# Altium PCB MainBoard_PCB.pcbdoc
Units mil, origin at the board's own origin, x right, y up, seen from the top; angles counter-clockwise.
Board outline 3695 x 4134.98 mil, 2 copper layers (Top Layer, Bottom Layer); 50 components, 43 nets, 212 pads, 192 vias.
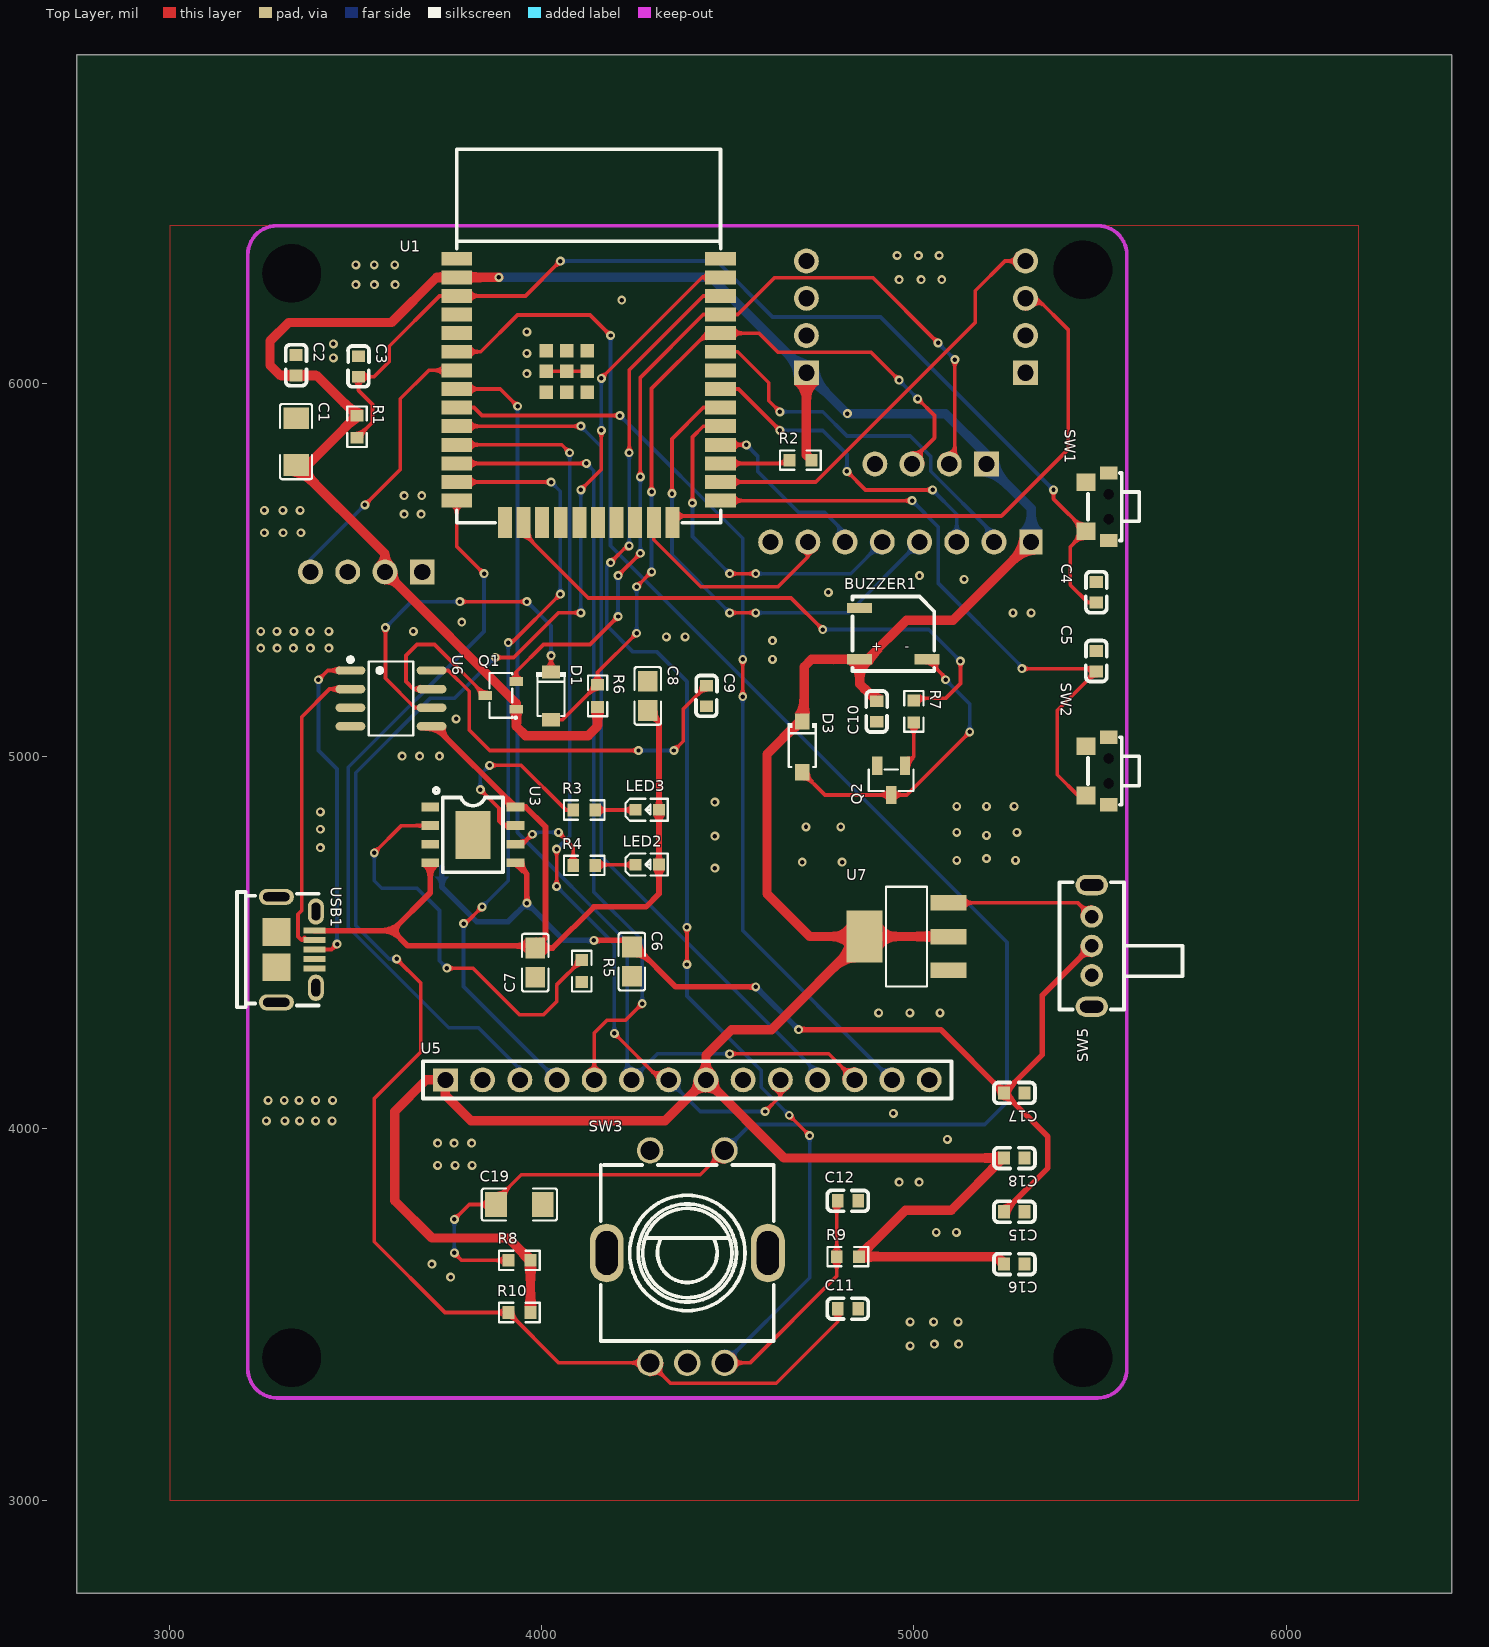
[diagram p0: Top Layer view]
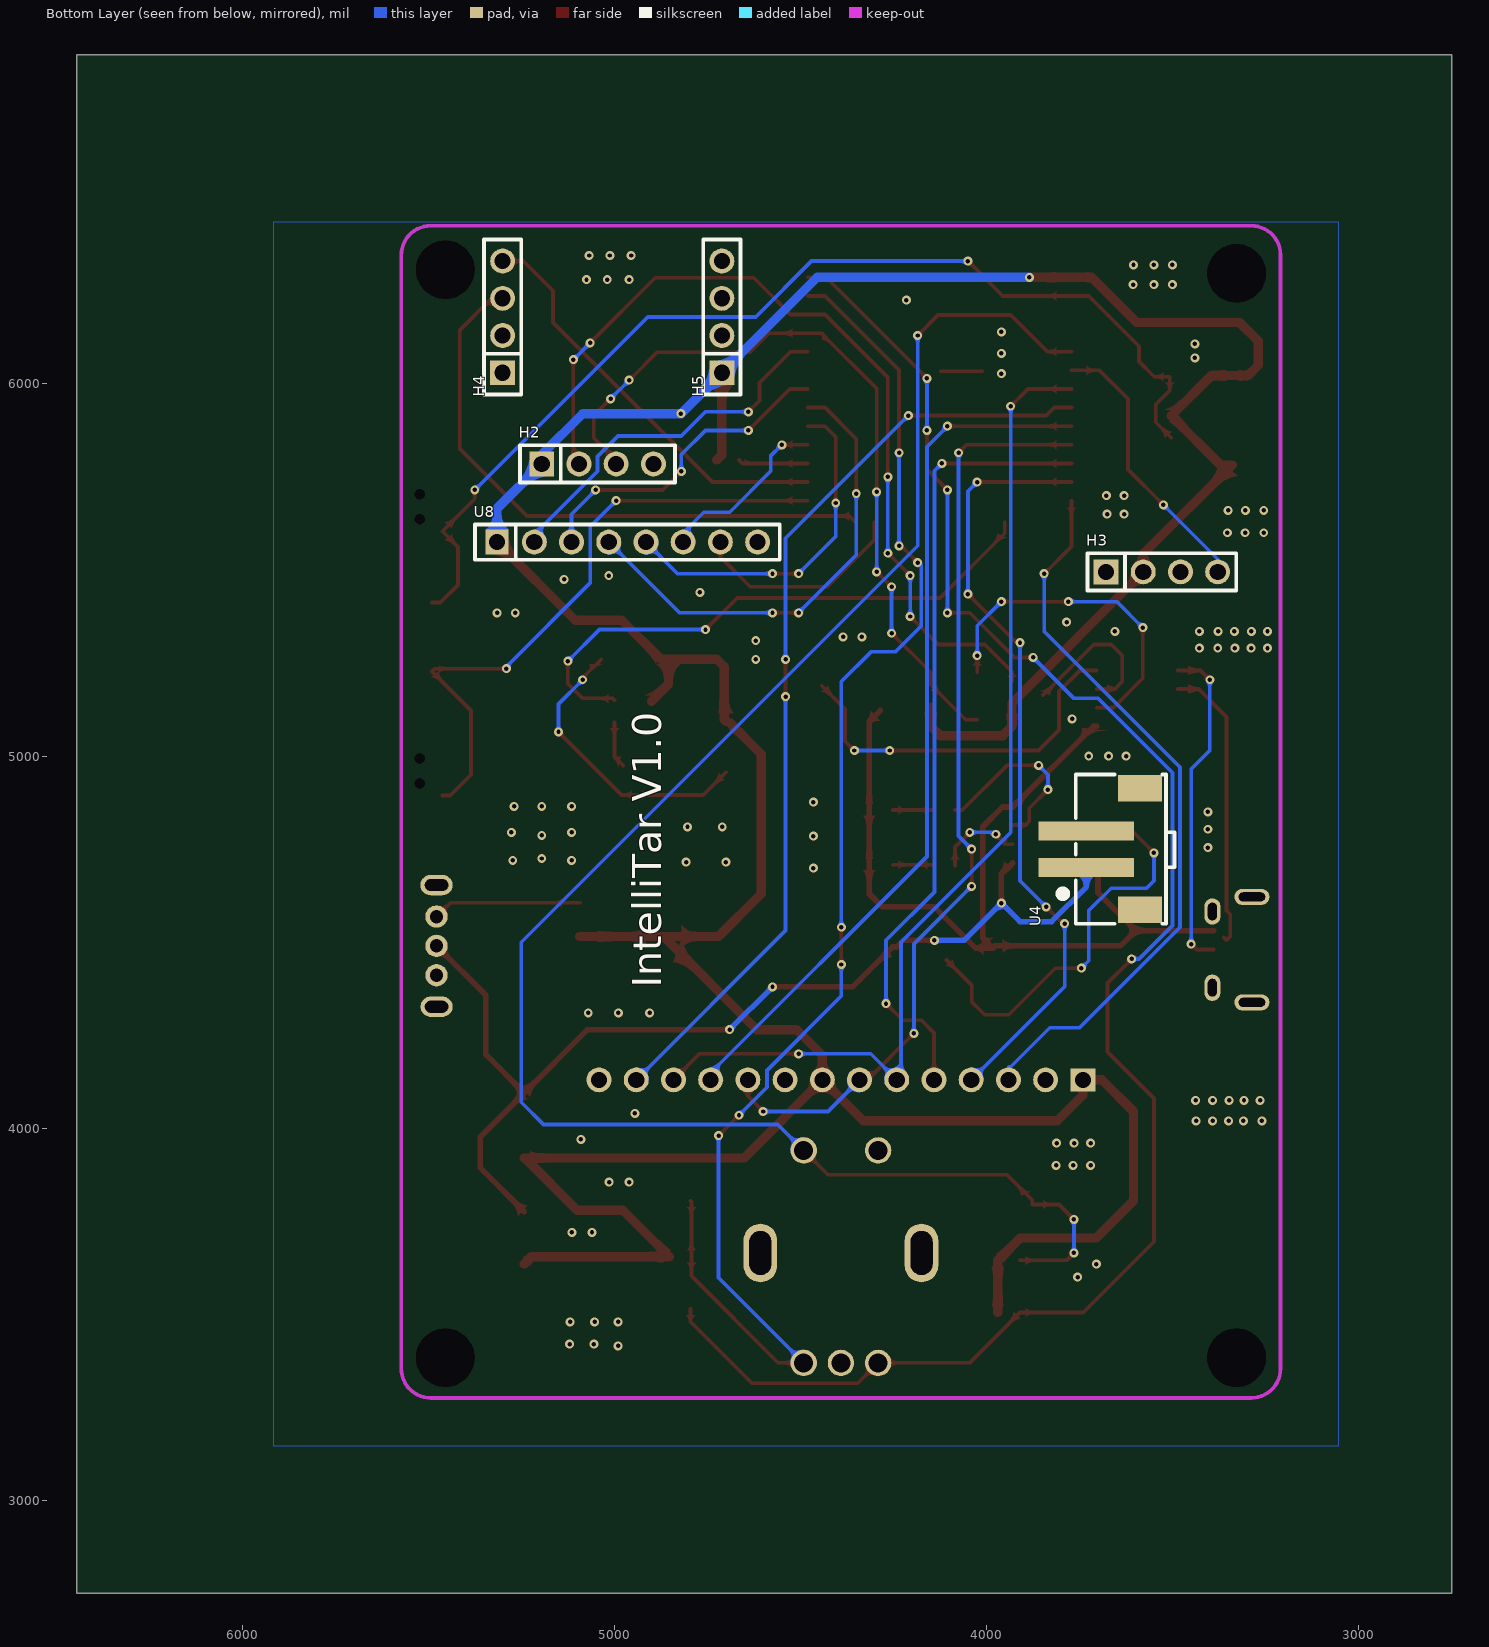
[diagram p1: Bottom Layer view, seen from below]

## Layer stack, top to bottom
Top Layer: signal copper (thickness not stored)
Dielectric: dielectric 12.6, FR-4, Dk 4.8
Bottom Layer: signal copper (thickness not stored)

## Board outline
6445,2750 2750,2750 2750,6884.98 6445,6884.98
cut-out: 3406.85,6296.89 ccw(c3328.11,6296.89) 3249.37,6296.89 ccw(c3328.11,6296.89)
cut-out: 3406.85,3383.5 ccw(c3328.11,3383.5) 3249.37,3383.5 ccw(c3328.11,3383.5)
cut-out: 5532.83,3383.5 ccw(c5454.09,3383.5) 5375.35,3383.5 ccw(c5454.09,3383.5)
cut-out: 5532.83,6306.89 ccw(c5454.09,6306.89) 5375.35,6306.89 ccw(c5454.09,6306.89)

## Components (designator, comment, footprint, x,y, rotation, side; value= is the part's Value field where it differs from the comment)
BUZZER1 "MLT-5020" BUZ-SMD_L5.0-W5.5-P4.60 4944.79,5328.74 r0 top
C1 "CL31A226KAHNNNE" C1206 3340,5845 r270 top
C2 "CC0603KRX7R9BB104" C0603 3339.89,6050 r270 top
C3 "CL10A105KB8NNNC" C0603 3507.44,6046.75 r270 top
C4 "CC0603KRX7R9BB104" C0603 5490,5440 r270 top
C5 "CC0603KRX7R9BB104" C0603 5490,5255 r270 top
C6 "CL21A106KAYNNNE_C15850" C0805 4242.15,4447.7 r270 top
C7 "CL21A106KAYNNNE_C15850" C0805 3982.5,4445 r90 top
C8 "CL21A106KAYNNNE_C15850" C0805 4285,5161.73 r270 top
C9 "CC0603KRX7R9BB104" C0603 4442.53,5161.43 r270 top
C10 "CC0603KRX7R9BB104" C0603 4900.08,5120 r90 top
C11 "CC0603KRX7R9BB104" C0603 4822.81,3515 r0 top
C12 "CC0603KRX7R9BB104" C0603 4822.81,3805 r0 top
C15 "CC0603KRX7R9BB104" C0603 5269.69,3775.62 r180 top
C16 "CC0603KRX7R9BB104" C0603 5269.69,3635.21 r180 top
C17 "CL10A106MA8NRNC" C0603 5269.69,4095 r180 top
C18 "CL10A106MA8NRNC" C0603 5269.69,3920 r180 top
C19 "CL31A107MQHNNNE" C1206 3940,3795 r0 top
D1 "B0520W_C475609" SOD-123_L2.7-W1.6-LS3.7-RD 4025,5161.73 r270 top
D3 "1N4148W_C81598" SOD-123F_L2.7-W1.6-LS3.8-RD 4700,5025 r270 top
H2 "PM254V-11-04-H85" HDR-TH_4P-P2.54-V-F 5045,5785 r180 bottom
H3 "X6511WV-04H-C60D30" HDR-TH_4P-P2.54-V-M 3528.81,5495 r180 bottom
H4 "PM254V-11-04-H85" HDR-TH_4P-P2.54-V-F 5300,6180 r90 bottom
H5 "PM254V-11-04-H85" HDR-TH_4P-P2.54-V-F 4711.06,6180 r90 bottom
LED2 "19-217/GHC-YR1S2/3T" LED0603-RD 4283.63,4708.25 r0 top
LED3 "NCD0603R1_C84263" LED0603-RD_RED 4283.64,4855.69 r0 top
Q1 "2SK3018" SOT-23-3_L2.9-W1.4-P1.90-LS2.6-BR 3890,5163.14 r0 top
Q2 "SS8050_C2150" SOT-23-3_L2.9-W1.3-P1.90-LS2.4-BR 4938.87,4935 r90 top
R1 "0603WAF1002T5E" R0603 3503.49,5885 r270 top
R2 "0603WAF1002T5E" R0603 4695,5795.27 r0 top
R3 "0603WAF1201T5E" R0603 4114.13,4855 r0 top
R4 "0603WAF1201T5E" R0603 4114.13,4706.15 r0 top
R5 "0603WAF1201T5E" R0603 4107.35,4422.22 r270 top
R6 "0603WAF2001T5E" R0603 4150,5161.73 r270 top
R7 "0603WAF1001T5E" R0603 4999.79,5120 r270 top
R8 "0603WAF1002T5E" R0603 3940,3645 r0 top
R9 "0603WAF1002T5E" R0603 4822.5,3655 r0 top
R10 "0603WAF1002T5E" R0603 3940,3505 r0 top
SW1 "TS24CA" SW-SMD_TS24CA 5492.5,5670 r270 top
SW2 "TS24CA" SW-SMD_TS24CA 5492.5,4960 r270 top
SW3 "EC11E15244G1" SW-TH_EC11E15244G1 4391.1,3655 r0 top
SW5 "SK12D07VG4" SW-TH_SK12D07VG4 5477.72,4490 r90 top
U1 "ESP32-WROOM-32E" WIFI-SMD_ESP32-WROOM-32E-A 4126.1,5981.93 r0 top
U3 "TP4056-42-ESOP8" ESOP-8_L4.9-W3.9-P1.27-LS6.0-BL-EP 3815,4788.12 r270 top
U4 "2.54-2PLTDK" COMM-SMD_2P-P2.50_SHOUHAN_2.54-2PLTDK 3660,4750 r90 bottom
U5 "PM254-1-14-Z-8.5" HDR-TH_14P-P2.54-V-F-1 4391.1,4130 r0 top
U6 "CH340N_C506813" SOP-8_L5.0-W4.0-P1.27-LS6.0-BL 3595,5155 r270 top
U7 "BL9110-330BPFB" SOT-223_L6.5-W3.5-P2.30-LS7.0-BR 4980,4515.04 r0 top
U8 "PM254-1-08-Z-8.5" HDR-TH_8P-P2.54-V-F 4965,5575 r180 bottom
USB1 "U254-051N-4BH24-S2S" MICRO-USB-SMD_U254-051N-4BH24-S2 3340,4480 r270 top

## Footprints (in the part's own frame and the unit in brackets; to place one, negate y for a bottom-side part, rotate by r counter-clockwise, add the part's x,y. Pads: shape width x height; smd on the part's side, far side on the other; paste and mask are expansions set on the pad)
BUZ-SMD_L5.0-W5.5-P4.60 [mm]
  rect 1.7x0.7 smd mask+0.051: 1(-2.3,-1.75) 2(2.3,-1.75) 3(-2.3,1.75)
  silkscreen extent -2.79,-2.54 2.79,2.54
C0603 [mm]
  rect 0.8x0.9 smd mask+0.051: 1(-0.7,0) 2(0.7,0)
  silkscreen extent -1.41,-0.71 1.39,0.72
C0805 [mm]
  rect 1.41x1.35 smd paste-100 mask+0.051: 1(-1,0) 2(1,0)
  silkscreen extent -1.96,-0.9 1.96,0.9
C1206 [mm]
  rect 1.485x1.728 smd paste-100 mask+0.051: 1(-1.593,0) 2(1.593,0)
  silkscreen extent -2.56,-1.09 2.56,1.09
COMM-SMD_2P-P2.50_SHOUHAN_2.54-2PLTDK [mm]
  rect 1.3x6.5 smd paste+0 mask+0.05: 1(-1.25,1.825) 2(1.25,1.825)
  rect 1.8x3 smd paste+0 mask+0.05: 3(4.15,-1.825) 4(-4.15,-1.825)
  silkscreen extent -5.1,-4.19 5.1,3.68
ESOP-8_L4.9-W3.9-P1.27-LS6.0-BL-EP [mm]
  rect 0.6x1.2 smd mask+0.051: 1(-1.905,-2.908) 2(-0.635,-2.908) 3(0.635,-2.908) 4(1.905,-2.908) 5(1.905,2.908) 6(0.635,2.908) 7(-0.635,2.908) 8(-1.905,2.908)
  rect 3.3x2.4 smd mask+0.051: 9(0,0)
  silkscreen extent -3.2,-2.67 2.55,2.05
HDR-TH_4P-P2.54-V-F [mm]
  rect 1.7x1.7 hole 1.1 mask+0.051: 1(-3.81,0)
  round 1.7 hole 1.1 mask+0.051: 2(-1.27,0) 3(1.27,0) 4(3.81,0)
  silkscreen extent -5.29,-1.27 5.29,1.27
HDR-TH_4P-P2.54-V-M [mm]
  rect 1.7x1.7 hole 1.1 mask+0.051: 1(-3.81,0)
  round 1.7 hole 1.1 mask+0.051: 2(-1.27,0) 3(1.27,0) 4(3.81,0)
  silkscreen extent -5.08,-1.27 5.08,1.27
HDR-TH_8P-P2.54-V-F [mm]
  rect 1.575x1.7 hole 1.1 mask+0.051: 1(-8.89,0)
  round 1.7 hole 1.1 mask+0.051: 2(-6.35,0) 3(-3.81,0) 4(-1.27,0) 5(1.27,0) 6(3.81,0) 7(6.35,0) 8(8.89,0)
  silkscreen extent -10.4,-1.2 10.4,1.2
HDR-TH_14P-P2.54-V-F-1 [mm]
  rect 1.7x1.575 hole 1.1 mask+0.051: 1(-16.51,0)
  round 1.7 hole 1.1 mask+0.051: 2(-13.97,0) 3(-11.43,0) 4(-8.89,0) 5(-6.35,0) 6(-3.81,0) 7(-1.27,0) 8(1.27,0) 9(3.81,0) 10(6.35,0) 11(8.89,0) 12(11.43,0) 13(13.97,0) 14(16.51,0)
  silkscreen extent -18.03,-1.27 18.03,1.27
LED0603-RD [mm]
  rect 0.8x0.8 smd mask+0.051: 1(-0.799,-0.003) 2(0.799,0.003)
  silkscreen extent -1.49,-0.75 1.39,0.76
LED0603-RD_RED [mm]
  rect 0.8x0.8 smd mask+0.051: 1(-0.8,-0.003) 2(0.8,0.003)
  silkscreen extent -1.49,-0.75 1.39,0.76
MICRO-USB-SMD_U254-051N-4BH24-S2 [mm]
  rect 0.4x1.5 smd paste-100 mask+0.051: 1(-1.3,1.25) 2(-0.65,1.25) 3(0,1.25) 4(0.65,1.25) 5(1.3,1.25)
  oval 1.1x2.4 hole 0.6 slot 1.8 at 90 deg mask+0.051: 6(-3.6,-1.35) 6(3.6,-1.35)
  oval 1.8x1.1 hole 0.6 slot 1.2 at 0 deg mask+0.051: 6(-2.6,1.35) 6(2.6,1.35)
  rect 1.9x1.9 smd paste-100 mask+0.051: 6(-1.2,-1.35) 6(1.2,-1.35)
  silkscreen extent -3.93,-4.04 3.93,1.52
R0603 [mil]
  rect 31.75x34.02 smd paste-3937.01 mask+2: 1(-29.66,0) 2(29.66,0)
  silkscreen extent -55,-26 55,26
SOD-123_L2.7-W1.6-LS3.7-RD [mm]
  rect 0.91x1.22 smd mask+0.051: 1(-1.635,0) 2(1.635,0)
  silkscreen extent -1.6,-1 1.38,1
SOD-123F_L2.7-W1.6-LS3.8-RD [mm]
  rect 1.1x1 smd mask+0.051: 1(-1.735,0) 2(1.735,0)
  silkscreen extent -1.6,-1 1.38,1
SOP-8_L5.0-W4.0-P1.27-LS6.0-BL [mil]
  oval 22.6x80.14 smd mask+2: 1(-75,-108.97) 2(-25,-108.97) 3(25,-108.97) 4(75,-108.97) 5(75,108.97) 6(25,108.97) 7(-25,108.97) 8(-75,108.97)
  silkscreen extent -110,-115 99,60
SOT-23-3_L2.9-W1.3-P1.90-LS2.4-BR [mm]
  rect 1.25x0.7 smd mask+0.051: 1(1,-0.95) 2(1,0.95) 3(-1,0)
  silkscreen extent -0.73,-1.53 0.73,1.53
SOT-23-3_L2.9-W1.4-P1.90-LS2.6-BR [mm]
  rect 0.91x0.6 smd mask+0.051: 1(1.055,-0.955) 2(1.055,0.955) 3(-1.055,0)
  silkscreen extent -0.78,-1.6 1.09,1.53
SOT-223_L6.5-W3.5-P2.30-LS7.0-BR [mm]
  rect 2.465x1.05 smd mask+0.051: 1(2.857,-2.3) 2(2.857,0) 3(2.857,2.3)
  rect 2.465x3.54 smd mask+0.051: 4(-2.857,0)
  silkscreen extent -1.4,-3.4 1.4,3.4
SW-SMD_TS24CA [mm]
  rect 0.9x1.2 smd mask+0.051: 1(-2.3,0.775) 2(2.3,0.775)
  rect 1.2x1.3 smd mask+0.051: 3(-1.675,-0.775) 4(1.675,-0.775)
  Multi-Layer board cut-out: -0.85,1.125 -1.002,1.09 -1.124,0.993 -1.191,0.853 -1.191,0.697 -1.124,0.557 -1.002,0.46 -0.85,0.425 -0.85,0.425 -0.698,0.46 -0.576,0.557 -0.509,0.697 -0.509,0.853 -0.576,0.993 -0.698,1.09 -0.85,1.125
  Multi-Layer board cut-out: 0.85,1.125 0.698,1.09 0.576,0.993 0.509,0.853 0.509,0.697 0.576,0.557 0.698,0.46 0.85,0.425 0.85,0.425 1.002,0.46 1.124,0.557 1.191,0.697 1.191,0.853 1.124,0.993 1.002,1.09 0.85,1.125
  silkscreen extent -2.3,-0.62 2.3,2.88
SW-TH_EC11E15244G1 [mm]
  oval 2.3x4 hole 1.5 slot 3 at 90 deg mask+0.051: 6(5.5,0.25) 7(-5.5,0.25)
  round 1.8 hole 1.3 mask+0.051: A(-2.54,-7.25) B(2.54,-7.25) C(0,-7.25) D(-2.54,7.25) E(2.54,7.25)
  silkscreen extent -5.9,-5.75 5.9,6.25
SW-TH_SK12D07VG4 [mil]
  round 60 hole 36 mask+2: 1(-78.74,0) 2(0,0) 3(78.74,0)
  oval 55.12x86.61 hole 31.5 slot 62.99 at 90 deg mask+2: 4(163.39,-0.01) 5(-163.39,0)
  silkscreen extent -171,-244 171,87
WIFI-SMD_ESP32-WROOM-32E-A [mm]
  rect 2.1x0.95 smd mask+0.051: 1(-9,9.003) 2(-9,7.733) 3(-9,6.463) 4(-9,5.193) 5(-9,3.923) 6(-9,2.653) 7(-9,1.383) 8(-9,0.113) 9(-9,-1.157) 10(-9,-2.427) 11(-9,-3.697) 12(-9,-4.967) 13(-9,-6.237) 14(-9,-7.507) 25(9,-7.507) 26(9,-6.237) 27(9,-4.967) 28(9,-3.697) 29(9,-2.427) 30(9,-1.157) 31(9,0.113) 32(9,1.383) 33(9,2.653) 34(9,3.923) 35(9,5.193) 36(9,6.463) 37(9,7.733) 38(9,9.003)
  rect 0.95x2.1 smd mask+0.051: 15(-5.715,-9.003) 16(-4.445,-9.003) 17(-3.175,-9.003) 18(-1.905,-9.003) 19(-0.635,-9.003) 20(0.635,-9.003) 21(1.905,-9.003) 22(3.175,-9.003) 23(4.445,-9.003) 24(5.715,-9.003)
  rect 0.9x0.9 smd mask+0.051: 39(-2.9,-0.108) 39(-2.9,1.322) 39(-2.9,2.722) 39(-1.5,1.322) 39(-1.5,-0.108) 39(-1.5,2.722) 39(-0.1,-0.108) 39(-0.1,1.322) 39(-0.1,2.722)
  silkscreen extent -9,-9.02 9.02,16.48

## Via types
v1: diameter 24.02, hole 12.01, Top Layer to Bottom Layer, 192 vias

## Nets (pads, with @x,y where several pads share a name; then routed paths per layer and width w, separated by ;. In a path a pad name is that pad's centre, name@x,y a point inside that pad or via, vN(x,y) a via of type N, cw(c..) or ccw(c..) an arc to the next point about the centre after c; other vN are vias at no path point)
3V3: BUZZER1.1 C1.2 C2.2 C10.2 C16.2 C18.2 D3.1 H2.1 H3.2 H5.1 Q1.1 R1.1 R2.2 R6.2 R8.2 R9.2 R10.2 U1.2 U5.1 U5.8 U7.2 U7.4 U8.1 | length 10794.8
  Top Layer w25: v1(3885,6286.36) U1.2 3717.93,6286.36 3596.57,6165 3320,6165 3270,6115 3270,6050 3297.56,6022.44 C2.2 3395.71,6022.44 R1.1 3371.13,5782.3 C1.2 3578.81,5543.49 H3.2 3931.54,5142.27 Q1.1 3931.54,5080 3956.54,5055 4125,5055 4150,5080 R6.2 ; R10.2 R8.2 3909.66,3705 3705,3705 3605,3805 3605,4045 3690,4130 U5.1 3741.1,4088.9 3810,4020 4331.1,4020 U5.8 ; D3.1@4690,5090 4605,5005 4605,4630 4719.96,4515.04 U7.4 ; D3.1 4705,5098.31 4705,5240 4724.85,5259.85 BUZZER1.1 ; H5.1 4711.06,5808.87 R2.2 ; C10.2 4854.24,5193.4 BUZZER1.1 ; U7.2 U7.4 ; C16.2 5222.35,3655 R9.2 4977.16,3780 5100,3780 C18.2@5240,3920 ; C18.2 C18.2@5240,3920 ; U8.1 5105,5365 4980,5365 4874.85,5259.85 BUZZER1.1 ; U5.8 4651.1,3920 C18.2@5240,3920 ; U5.8 4441.1,4196.1 4510,4265 4617.46,4265 U7.4
  Bottom Layer w25: v1(3885,6286.36) 4454.7,6286.36 H5.1 v1(4821.06,5920) 5085,5920 5195,5810 H2.1 5315,5665 U8.1
$1N1883: R2.1 U1.27 | length 188.6
  Top Layer w10: U1.27 4656.42,5786.36 R2.1
$1N3284: R3.1 U3.7 | length 504.7
  Top Layer w10: v1(3835,4910) 3885,4860 3885,4825 3895,4815 3927.62,4815 U3.7 ; v1(3860,4975) 3945,4975 4065,4855 R3.1
  Bottom Layer w10: v1(3835,4910) 3835,4950 v1(3860,4975)
$1N3295: R4.1 U3.6 | length 233.9
  Top Layer w10: U3.6 3948.12,4763.12 v1(3975,4790) ; v1(4045,4795) 4084.47,4755.53 R4.1
  Bottom Layer w10: v1(3975,4790) 3980,4795 v1(4045,4795)
$1N3334: LED3.1 R3.2 | length 108.6
  Top Layer w10: R3.2 4251.6,4855 LED3.1
$1N3373: LED2.1 R4.2 | length 109.2
  Top Layer w10: R4.2 4145.75,4708.12 LED2.1
$1N3449: R5.1 U3.2 | length 1128.3
  Top Layer w10: v1(3550,4740) 3623.12,4813.12 U3.2 ; v1(3745,4430) 3815,4430 3940,4305 4005,4305 4040,4340 4040,4384.53 R5.1
  Bottom Layer w10: v1(3550,4740) 3550,4665 3570,4645 3665,4645 3725,4585 3725,4450 v1(3745,4430)
$1N5959: C9.1 U6.8 | length 1011.3
  Top Layer w10: U6.8 3749.04,5230 3805,5174.04 3805,5070 3860,5015 v1(4260,5015) ; v1(4355,5015) 4380,5040 4380,5126.46 C9.1
  Bottom Layer w10: v1(4260,5015) v1(4355,5015)
$1N6739: BUZZER1.2 D3.2 Q2.3 | length 787.8
  Top Layer w10: D3.2 4761.06,4895.63 Q2.3 4980.63,4895.63 v1(5150,5065) ; BUZZER1.2 5085,5210.19 v1(5085,5205)
  Bottom Layer w10: v1(5085,5205) 5150,5140 v1(5150,5065)
$1N6840: Q2.1 R7.2 | length 125.7
  Top Layer w10: Q2.1 4999.79,4997.9 R7.2
$1N8457: Q1.3 U6.7 | length 429.8
  Top Layer w10: U6.7 3655,5180 3635,5200 3635,5270 3665,5300 3711.6,5300 Q1.3
$1N8461: D1.1 U6.6 | length 917.6
  Top Layer w10: v1(3580,5345) 3580,5208.9 3658.9,5130 U6.6 ; v1(3780,5415) v1(3960,5415) ; D1.1 v1(4025,5270)
  Bottom Layer w10: v1(3580,5345) 3650,5415 v1(3780,5415) ; v1(3960,5415) 4025,5350 v1(4025,5270)
$1N12783: SW5.3 U7.3 | length 400.5
  Top Layer w10: U7.3 5440.86,4605.59 SW5.3
BEEP: R7.1 U1.16 | length 1548.9
  Top Layer w10: U1.16 3951.11,5598.89 4125,5425 4670,5425 v1(4755,5340) ; R7.1 5005.13,5155 5085,5155 5125,5195 v1(5125,5255)
  Bottom Layer w10: v1(4755,5340) 5040,5340 v1(5125,5255)
D+: U6.1 USB1.3 | length 894
  Top Layer w10: USB1.3@3389.31,4480 3435,4480 v1(3450,4495) ; v1(3400,5205) 3425,5230 U6.1
  Bottom Layer w10: v1(3400,5205) 3400,5015 3450,4965 v1(3450,4495)
D-: U6.2 USB1.2 | length 780
  Top Layer w10: USB1.2@3362.31,4512.31 3355.59,4505.59 3354.78,4505.59 3345,4515.37 3345,4575 3355,4585 3355,5105 3430,5180 U6.2
EC11_A: C11.1 R10.1 SW3.A U1.37 | length 4770.6
  Top Layer w10: v1(3610,4455) 3675,4390 3675,4205 3550,4080 3550,3695 3740,3505 R10.1 4045.78,3369.57 SW3.A 4345.66,3315 4630,3315 4795.25,3480.25 C11.1 ; v1(3875,5265) 3925,5265 4045,5385 v1(4105,5385) ; v1(4105,5715) 4160,5770 v1(4160,5875) ; v1(4160,6015) 4431.36,6286.36 U1.37
  Bottom Layer w10: v1(3610,4455) 3590,4455 3500,4545 3500,4955 3700,5155 3765,5155 v1(3875,5265) ; v1(4105,5385) v1(4105,5715) ; v1(4160,5875) v1(4160,6015)
EC11_B: C12.1 R9.1 SW3.B U1.36 | length 3983.5
  Top Layer w10: v1(4185,5520) 4230,5565 v1(4235,5565) ; v1(4235,5815) 4235,6037.27 4434.09,6236.36 U1.36 ; v1(4390,4440) v1(4390,4540) ; SW3.B 4559.56,3369.57 4792.84,3602.84 R9.1 4792.84,3802.59 C12.1 ; v1(4665,4035) v1(4720,3980)
  Bottom Layer w10: v1(4185,5520) 4175,5510 4175,5350 4245,5280 4310,5280 4390,5200 v1(4390,4540) ; v1(4235,5565) v1(4235,5815) ; v1(4390,4440) 4390,4355 4590,4155 4590,4110 v1(4665,4035) ; SW3.B 4720,3598.47 v1(4720,3980)
EC11_KEY: C19.1 R8.1 SW3.E U1.6 | length 4844.3
  Top Layer w10: v1(3765,3665) 3785,3645 R8.1 ; v1(3765,3755) 3805,3795 C19.1 3877.3,3807.3 3945,3875 4425.66,3875 SW3.E ; U1.6 3836.36,6086.36 3935,6185 4130,6185 v1(4185,6130)
  Bottom Layer w10: v1(3765,3665) v1(3765,3755) ; v1(4185,6130) 4185,5565 5250,4500 5250,4070 5190,4010 4560.66,4010 SW3.E
EN: C3.2 C4.2 R1.2 SW1.4 U1.3 | length 2869.7
  Top Layer w10: R1.2 3545,5896.85 3545,5945 3507.44,5982.56 C3.2 3549.19,6019.19 3590,6060 3590,6100.93 3725.43,6236.36 U1.3 3956.36,6236.36 v1(4050,6330) ; v1(5375,5715) 5375,5691.04 SW1.4 5420,5562.06 5420,5460 5467.56,5412.44 C4.2
  Bottom Layer w10: v1(4050,6330) 4470,6330 4620,6180 4910,6180 v1(5375,5715)
GND: C1.1 C2.1 C3.1 C4.1 C5.1 C6.2 C7.1 C8.1 C9.2 C10.1 C11.2 C12.2 C15.1 C16.1 C17.1 C18.1 C19.2 H2.4 H3.1 H3.3 H4.1 Q2.2 R5.2 SW1.3 SW2.3 SW3.6 SW3.7 SW3.C SW3.D SW5.4 SW5.5 U1.1 U1.15 U1.38 U1.39 U3.1 U3.3 U3.9 U4.2 U4.3 U4.4 U5.2 U6.3 U7.1 U8.8 USB1.5 USB1.6 | length 110.2
  Top Layer w10: U1.39@4011.93,6033.96 4067.04,6033.96 U1.39@4122.17,6033.96
  other v1: 4990,3415 5055,3420 5120.27,3420 4990,3480 5053.13,3480 5118.84,3480 3755,3600 3705,3635 5060,3720 5113.84,3720 4960,3855 5013.84,3855 3720,3900 3767.42,3900 3813.13,3900 3720,3960 3764.56,3960 3811.7,3960 5090,3970 3260,4020 3309.56,4020 3349.56,4020 3392.42,4020 3436.7,4020 4945,4040 3265,4075 3308.13,4075 3348.13,4075 3392.42,4075 3438.13,4075 4905,4310 4989.08,4310 5070.04,4310 4465,4699.05 4700,4715 4807.18,4715 5115,4720 5272.89,4720 5195,4724.76 3405,4753.93 4465,4785 5195,4786.67 5115,4795 5276.7,4795 3405,4803.46 4710,4810 4803.37,4810 3405,4850 5115,4865 5195,4865 5269.08,4865 4465,4876.19 3625,5000 3671.94,5000 3725.27,5000 3770,5100 4620,5260 3245,5290 3289.08,5290 3332.89,5290 3378.61,5290 3428.13,5290 4620,5310 4335,5320 4385,5320 3245,5335 3288.13,5335 3333.84,5335 3377.65,5335 3428.13,5335 3655,5335 3785,5360 5266.23,5385 5315,5385 4770,5440 5135,5475 5015,5485 3255,5600 3305.27,5600 3352.89,5600 3630,5650 3675.75,5650 3255,5660 3304.32,5660 3350.99,5660 3630,5700 3677.65,5700 3960,6027.62 3440,6070 3960,6081.91 3440,6107.78 3960,6140 4215,6225 3500.56,6266.89 3550.09,6266.89 3605.96,6266.89 4960,6280 5019.08,6280 5074.8,6280 3500.56,6320 3550,6320 3605,6320 4955,6345 5011.94,6345 5067.65,6345
IO0: C5.2 SW2.4 U1.25 | length 1712.3
  Top Layer w10: U1.25 v1(4995,5686.36) ; v1(5290,5235) 5482.44,5235 C5.2 5385,5122.44 5385,4950 5440.95,4894.05 SW2.4
  Bottom Layer w10: v1(4995,5686.36) 5065,5616.36 5065,5465 5290,5240 v1(5290,5235)
MIC: H3.4 U1.7 | length 748.3
  Top Layer w10: v1(3525,5675) 3620,5770 3620,5960 3696.36,6036.36 U1.7
  Bottom Layer w10: H3.4 3378.81,5528.81 v1(3525,5675)
RCLK_X: U1.30 U8.4 | length 1285.4
  Top Layer w10: v1(4350,5705) 4350,5852.27 4434.09,5936.36 U1.30 ; v1(4505,5385) v1(4575,5385)
  Bottom Layer w10: v1(4350,5705) 4350,5540 v1(4505,5385) ; v1(4575,5385) 4825,5385 U8.4
RCLK_Y: U1.23 U8.7 | length 585.6
  Top Layer w10: U1.23 4301.11,5581.16 4427.27,5455 4635,5455 4715,5535 U8.7
RXD: D1.2 H2.3 R6.1 U1.34 | length 2088.3
  Top Layer w10: D1.2 4055.97,5097.36 R6.1 4150,5225 v1(4255,5330) ; v1(4255,5455) v1(4295,5495) ; v1(4295,5710) 4295,5987.43 4443.93,6136.36 U1.34 4583.64,6136.36 4635,6085 4885,6085 v1(4960,6010) ; H2.3 4995,5795 5055,5855 5055,5915 v1(5010,5960)
  Bottom Layer w10: v1(4255,5330) v1(4255,5455) ; v1(4295,5495) v1(4295,5710) ; v1(4960,6010) v1(5010,5960)
SER_X: U1.33 U8.2 | length 1009.7
  Top Layer w10: U1.33 4526.77,6086.36 4610,6003.13 4610,5955 v1(4640,5925)
  Bottom Layer w10: v1(4640,5925) 4755,5925 4820,5860 4990,5860 5045,5805 5045,5765 5215,5595 U8.2
SER_Y: U1.29 U8.5 | length 941.4
  Top Layer w10: v1(4405,5680) 4405,5857.27 4434.09,5886.36 U1.29 ; v1(4505,5490) v1(4575,5490)
  Bottom Layer w10: v1(4405,5680) 4405,5590 v1(4505,5490) ; v1(4575,5490) 4830,5490 U8.5
SRCLK_X: U1.31 U8.3 | length 875.3
  Top Layer w10: U1.31 4528.64,5986.36 v1(4640,5875) ; v1(4820,5765) 4870,5715 v1(5050,5715)
  Bottom Layer w10: v1(4640,5875) 4755,5875 4820,5810 v1(4820,5765) ; v1(5050,5715) 5115,5650 U8.3
SRCLK_Y: U1.28 U8.6 | length 481.7
  Top Layer w10: U1.28 v1(4550,5836.36)
  Bottom Layer w10: v1(4550,5836.36) 4580,5806.36 4580,5765 4690,5655 4760,5655 4815,5600 U8.6
T_CS: U1.10 U5.11 | length 2353.1
  Top Layer w10: U1.10 v1(4105,5886.36)
  Bottom Layer w10: v1(4105,5886.36) 4160,5831.36 4160,4730 4741.1,4148.9 U5.11
TFT_CS: U1.14 U5.3 | length 1943.2
  Top Layer w10: U1.14 3771.77,5563.23 v1(3845,5490)
  Bottom Layer w10: v1(3845,5490) 3845,5335 3480,4970 3480,4540 3750,4270 3830,4270 3935,4165 3940,4165
TFT_DC/RS: U1.12 U5.5 | length 2149.4
  Top Layer w10: U1.12 v1(4120,5786.36) ; U5.5 4141.1,4256.1 4175,4290 4225,4290 v1(4270,4335)
  Bottom Layer w10: v1(4120,5786.36) 4140,5766.36 4140,4635 4270,4505 v1(4270,4335)
TFT_MISO: U1.9 U5.13 | length 2534.9
  Top Layer w10: U1.9 3818.11,5936.36 3839.47,5915 v1(4210,5915) ; v1(4540,5160) v1(4540,5260)
  Bottom Layer w10: v1(4210,5915) 4540,5585 v1(4540,5260) ; v1(4540,5160) 4540,4531.1 U5.13
TFT_MOSI: U1.8 U5.6 U5.12 | length 2777.2
  Top Layer w10: U1.8 3888.64,5986.36 v1(3935,5940) ; v1(4505,4200) 4771.1,4200 U5.12
  Bottom Layer w10: v1(3935,5940) 3935,4795 4230,4500 4230,4141.1 U5.6 4311.1,4200 v1(4505,4200)
TFT_RST: U1.13 U5.4 | length 2090.4
  Top Layer w10: U1.13 v1(4025,5736.36) ; v1(3790,4550) 3795,4550 v1(3840,4595) ; v1(3910,5305) 3920,5305 v1(4050,5435)
  Bottom Layer w10: v1(3790,4550) 3790,4381.1 U5.4 ; v1(3840,4595) 3910,4665 v1(3910,5305) ; v1(4025,5736.36) 4050,5711.36 v1(4050,5435)
TFT_SCK: U1.11 U5.7 U5.10 | length 2544.8
  Top Layer w10: U1.11 4053.64,5836.36 v1(4075,5815) ; v1(4040,4650) v1(4040,4750) ; v1(4195,4255) 4320,4130 U5.7 ; v1(4600,4045) 4641.1,4086.1 U5.10
  Bottom Layer w10: v1(4040,4650) 4195,4495 v1(4195,4255) ; v1(4040,4750) 4075,4785 v1(4075,5815) ; U5.7 4426.1,4045 v1(4600,4045)
TXD: H2.2 Q1.2 U1.35 | length 2361.1
  Top Layer w10: Q1.2 3931.54,5226.54 4005,5300 4130,5300 v1(4205,5375) ; v1(4205,5485) v1(4265,5545) ; v1(4265,5750) 4265,6017.27 4434.09,6186.36 U1.35 4526.77,6186.36 4625.41,6285 4890,6285 v1(5065,6110) ; H2.2 5110,5800 v1(5110,6065)
  Bottom Layer w10: v1(4205,5375) v1(4205,5485) ; v1(4265,5545) v1(4265,5750) ; v1(5065,6110) v1(5110,6065)
U1RXD: H4.3 U1.24 | length 1615.9
  Top Layer w10: U1.24 4368.61,5645 5235,5645 5415,5825 5415,6145 5330,6230 H4.3
U1TXD: H4.4 U1.26 | length 1115.3
  Top Layer w10: U1.26 4736.36,5736.36 5165,6165 5165,6250 5245,6330 H4.4
VIN: C6.1 C15.2 C17.2 SW5.2 U3.5 U4.1 | length 2863.8
  Top Layer w15: U3.5 3960,4682.62 v1(3960,4605) ; v1(4140,4505) 4224.22,4505 C6.1 4252.93,4487.07 4360,4380 v1(4575,4380) ; v1(4690,4265) 5072.14,4265 C17.2 ; C15.2 5360,3893.49 5360,3977.14 C17.2 ; SW5.2 5345,4357.28 5345,4197.86 C17.2
  Bottom Layer w15: U4.1 3731.85,4648.15 3825,4555 3910,4555 v1(3960,4605) 4060,4505 v1(4140,4505) ; v1(4575,4380) v1(4690,4265)
VUSB: C7.2 C8.2 LED2.2 LED3.2 U3.4 U3.8 U6.5 USB1.1 | length 2489.2
  Top Layer w15: USB1.1@3389.31,4531.18 3598.82,4531.18 ; U3.4 3700.5,4632.86 3598.82,4531.18 ; U6.5 3712.62,5080 U3.8 3956.88,4863.12 4010,4810 4010,4511.87 C7.2 ; C8.2 4315.11,5092.25 LED3.2 ; LED3.2 LED2.2 4315,4708.28 4315,4630 4280,4595 4140,4595 4029.37,4484.37 C7.2 ; 3598.82,4531.18 3640,4490 3976.87,4490 C7.2
"": BUZZER1.3 H4.2 H5.2 H5.3 H5.4 SW1.1 SW1.2 SW2.1 SW2.2 SW5.1 U1.4 U1.5 U1.17 U1.18 U1.19 U1.20 U1.21 U1.22 U1.32 U5.9 U5.14 U6.4 USB1.4

## Polygon pours and split planes (outlines as drawn)
GND on Top Layer (solid, remove dead copper, pour order 0): 3000,3000 6195,3000 6195,6425 3000,6425
GND on Bottom Layer (solid, remove dead copper, pour order 1): 3055,3145 5915,3145 5915,6435 3055,6435

## Keep-outs
Board Outline Layer:
  lines w10 net "": 3210,3354.13 ccw(c3288.74,3354.13) 3288.74,3275.39 5493.46,3275.39 ccw(c5493.46,3354.13) 5572.2,3354.13 5572.2,6346.26 ccw(c5493.46,6346.26) 5493.46,6425 3288.74,6425 ccw(c3288.74,6346.26) 3210,6346.26 3210,3354.13

## Other copper
Top Layer:
  drawing of 216 lines, arcs and shapes, not listed
Bottom Layer:
  drawing of 107 lines, arcs and shapes, not listed

## Silkscreen, mask and mechanical layers (free items; w line width, h text height)
Bottom Silkscreen Layer:
  text "IntelliTar V1.0" at 4873.36,4377.31 h77.88 r270
Mechanical Layer:
  circle w1 net "": c3328.11,6296.89 r78.74
  circle w1 net "": c3328.11,3383.5 r78.74
  circle w1 net "": c5454.09,3383.5 r78.74
  circle w1 net "": c5454.09,6306.89 r78.74

## Text inside footprints (layer, text, board x,y; h text height)
BUZZER1: Top Silkscreen Layer "+" at 4884.79,5282.39 h25.74; Top Silkscreen Layer "-" at 4974.79,5282.39 h25.74